# EAGLE board Ink_Time (EAGLE 9.7.0)
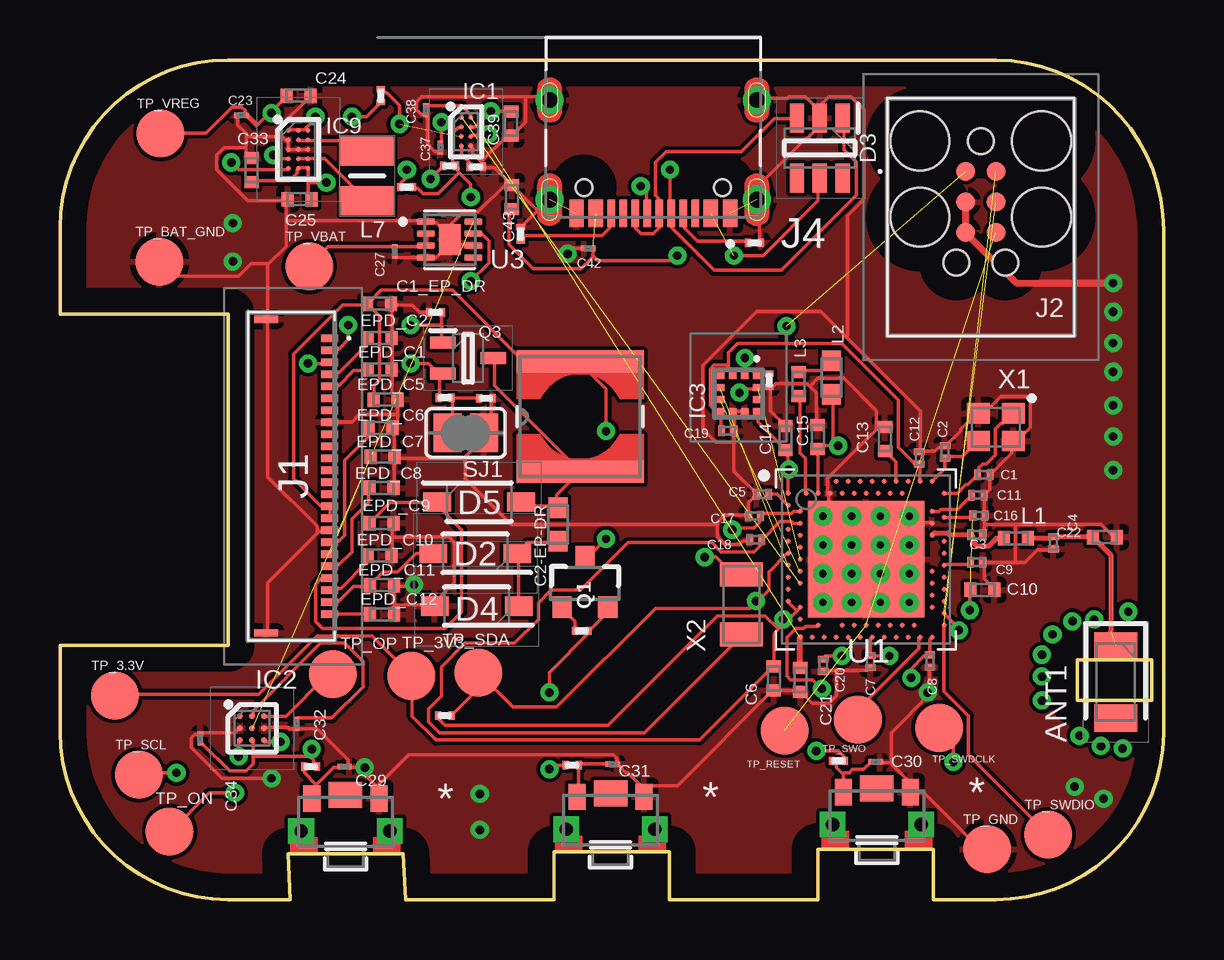
[diagram p0: board, top side]
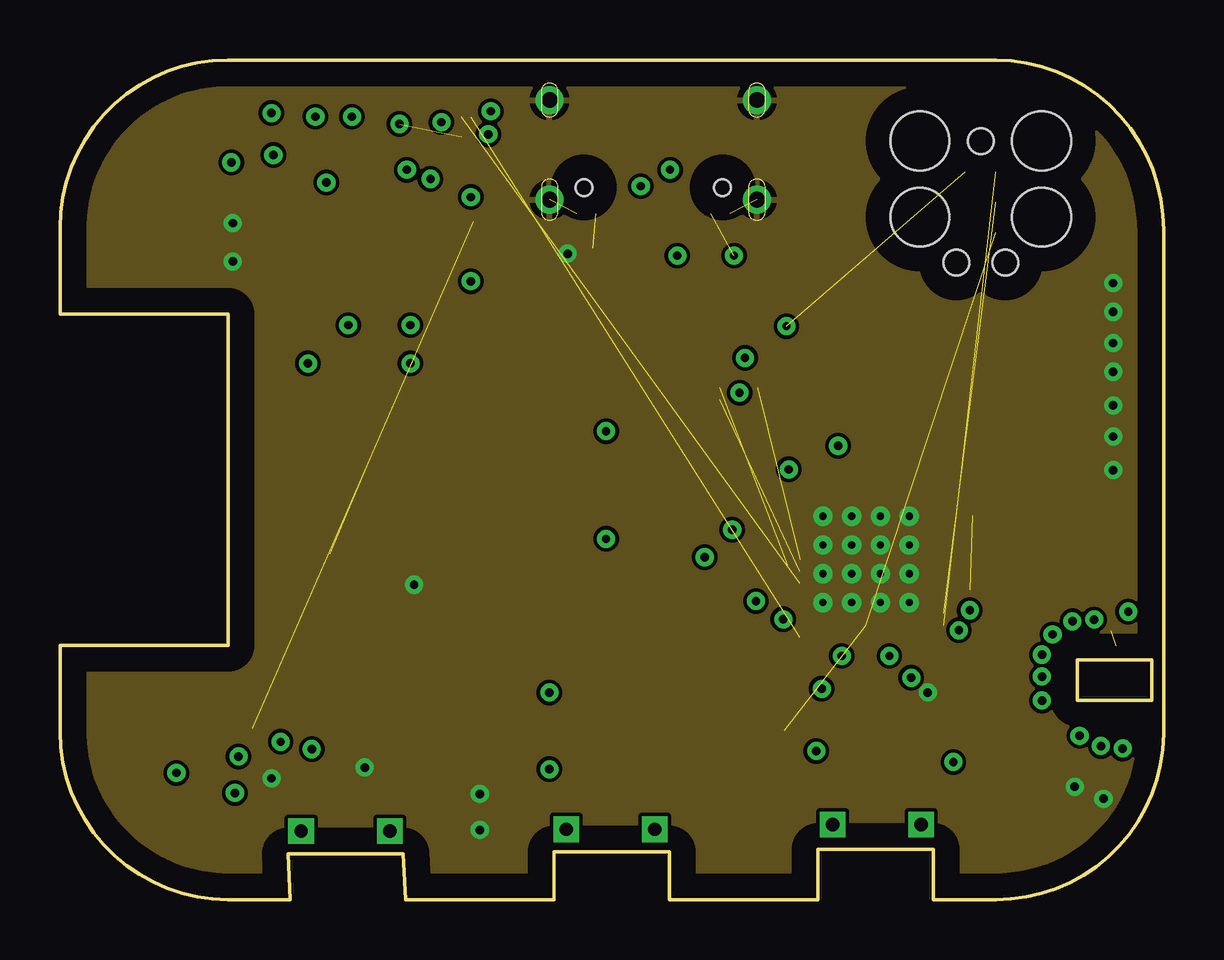
[diagram p1: board, inner layer Route2]
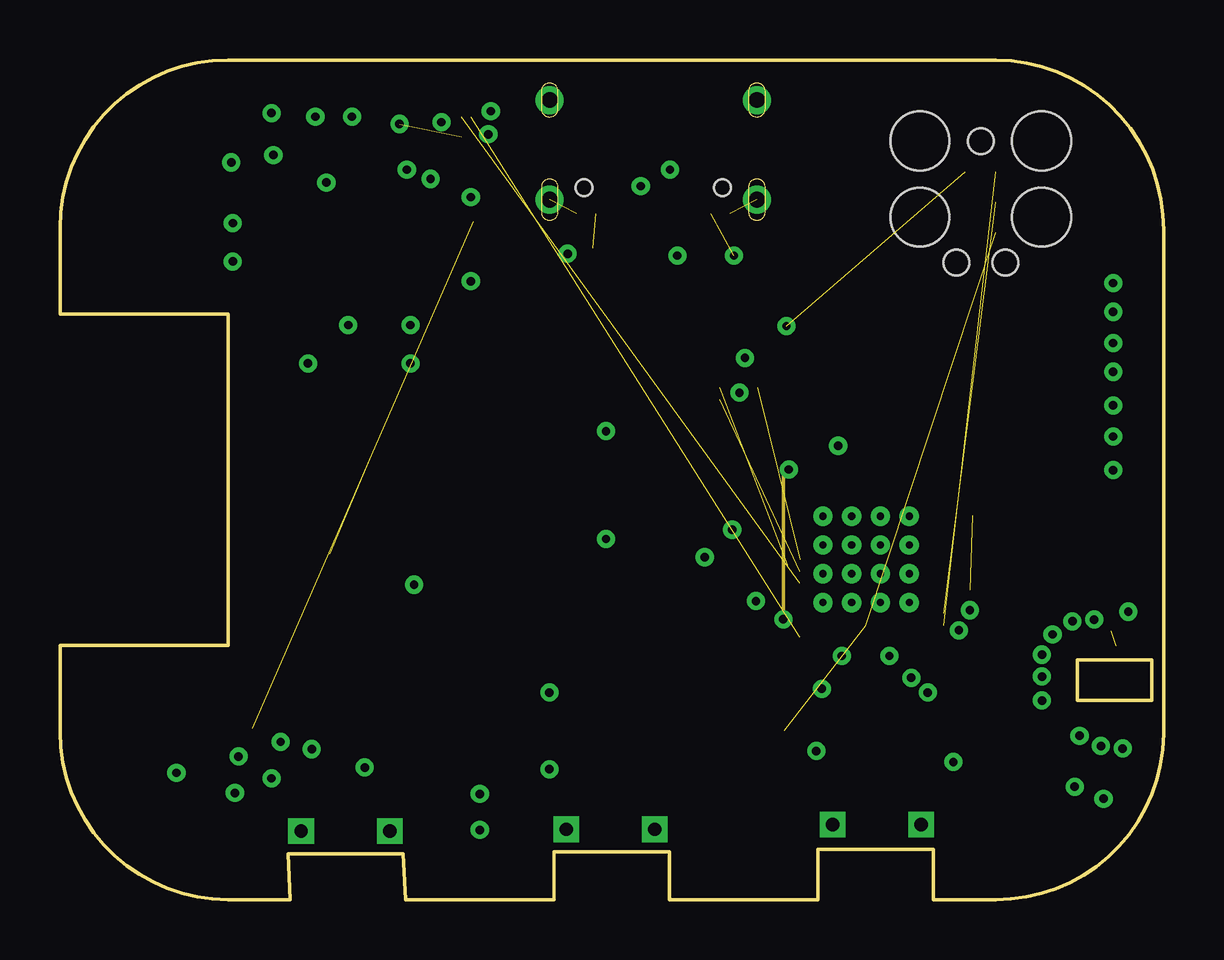
[diagram p2: board, inner layer Route15]
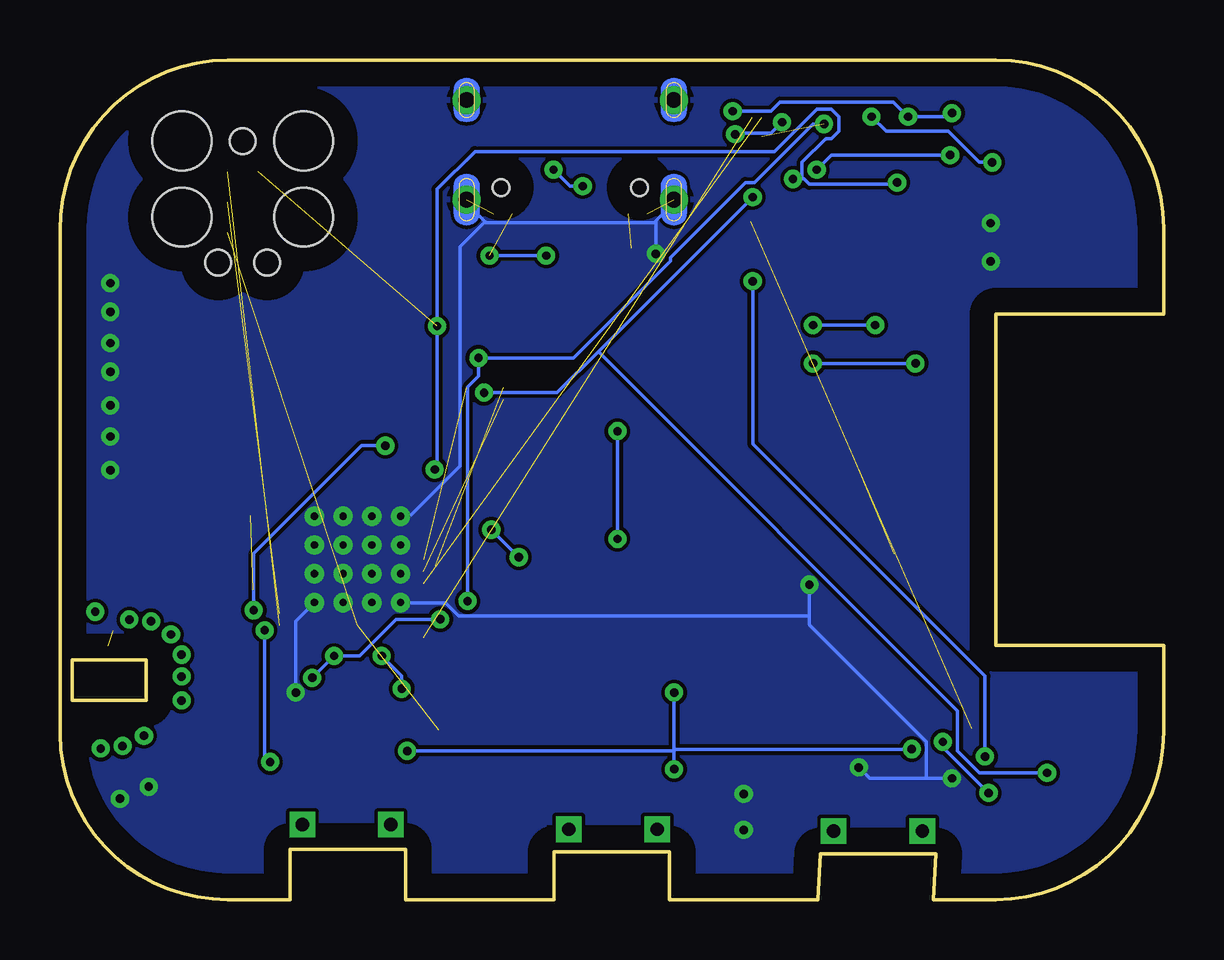
[diagram p3: board, bottom side, seen from below]

Size 46 x 35 mm. Coordinates in mm from the lower left corner, seen from the top.
Outline: 39,0 36.4,0 36.4,2.1 31.6,2.1 31.6,0 25.4,0 25.4,2 20.6,2 20.6,0 14.4,0 14.3,1.9 9.5,1.9 9.6,0 7,0 arc-90 0,7 0,10.6 7,10.6 7,24.4 0,24.4 0,28 arc-90 7,35 39,35 arc-90 46,27.9 46,6.9 arc-90 39,0
Outline: 45.5,10 42.4,10 42.4,8.3 45.5,8.3 45.5,10
Copper layers (1+2*15+16): Top 0.035mm / dielectric 1.5mm / Route2 0.035mm / dielectric 0.15mm / Route15 0.035mm / dielectric 0.2mm / Bottom 0.035mm
Design rules "Fusion Electronics Design Rules *": minimum track width 6mil, minimum drill 0.35mm, track to track 6mil, track to pad 6mil, pad to pad 6mil, via to via 6mil, smd to smd 6mil, copper to edge 40mil, drill to drill 6mil, minimum pad ring 10mil, minimum via ring 8mil, stop-mask expansion 4mil, vias tented up to drill 9999mil, thermal gap 10mil

## Footprints (pad centres in the part's own frame; a part is rotated, then mirrored left to right if it is on the bottom)
2450AT18B100E_ANTC3216X140N = smd 1.15 x 1.8: 1 -1.5,0; 2 1.5,0
NORDIC_NRF_3_RESC0201_L = smd 0.28 x 0.43: 1 -0.255,0; 2 0.255,0
NORDIC_NRF_3_RESC0402_L = smd 0.5 x 0.6: 1 -0.5,0; 2 0.5,0
NORDIC_NRF_3_RESC0603_L = smd 0.85 x 0.8: 1 -0.7,0; 2 0.7,0
GRM011R60J152KE01L_2_CAPC0201X13N = smd 0.22 x 0.23: 1 -0.185,0; 2 0.185,0
ESP32_C6_LIBRARY_5_SOD3716X135N = smd 1.15 x 0.8: 1 -1.75,0; 2 1.75,0
ESP32_C6_LIBRARY_3_SOT95P280X145-6N = smd 1.2 x 0.6: 1 -1.25,0.95; 2 -1.25,0; 3 -1.25,-0.95; 4 1.25,-0.95; 5 1.25,0; 6 1.25,0.95
RESC0402_L = smd 0.5 x 0.6: 1 -0.5,0; 2 0.5,0
BQ25180YBGR_BGA8C40P2X4_100X155X50 = smd 0.2 x 0.2: A1 -0.2,0.6; A2 0.2,0.6; B1 -0.2,0.2; B2 0.2,0.2; C1 -0.2,-0.2; C2 0.2,-0.2; D1 -0.2,-0.6; D2 0.2,-0.6
DRV2605YZFR_BGA9C50P3X3_144X144X62 = smd 0.25 x 0.25: A1 -0.5,0.5; A2 0,0.5; A3 0.5,0.5; B1 -0.5,0; B2 0,0; B3 0.5,0; C1 -0.5,-0.5; C2 0,-0.5; C3 0.5,-0.5
BMA423_BMA423 = smd 0.3 x 0.35: 1 -0.75,-0.775; 2 -0.25,-0.775; 3 0.25,-0.775; 4 0.75,-0.775; 7 0.75,0.775; 8 0.25,0.775; 9 -0.25,0.775; 10 -0.75,0.775 | smd 0.35 x 0.3: 5 0.775,-0.25; 6 0.775,0.25; 11 -0.775,0.25; 12 -0.775,-0.25
RT6160AWSC_BGA15C40P3X5_140X230X60 = smd 0.216 x 0.216: A1 -0.4,0.8; A2 0,0.8; A3 0.4,0.8; B1 -0.4,0.4; B2 0,0.4; B3 0.4,0.4; C1 -0.4,0; C2 0,0; C3 0.4,0; D1 -0.4,-0.4; D2 0,-0.4; D3 0.4,-0.4; E1 -0.4,-0.8; E2 0,-0.8; E3 0.4,-0.8
503480-2400_5034802400 = smd 0.3 x 0.7: 1 -5.75,1.525; 2 -5.25,1.525; 3 -4.75,1.525; 4 -4.25,1.525; 5 -3.75,1.525; 6 -3.25,1.525; 7 -2.75,1.525; 8 -2.25,1.525; 9 -1.75,1.525; 10 -1.25,1.525; 11 -0.75,1.525; 12 -0.25,1.525; 13 0.25,1.525; 14 0.75,1.525; 15 1.25,1.525; 16 1.75,1.525; 17 2.25,1.525; 18 2.75,1.525; 19 3.25,1.525; 20 3.75,1.525; 21 4.25,1.525; 22 4.75,1.525; 23 5.25,1.525; 24 5.75,1.525 | smd 0.3 x 1: MP1 -6.54,-1.125; MP2 6.54,-1.125
TC2030-IDC_TC2030IDC = smd 0.783 x 0.783: 1 -0.953,-0.635; 2 -0.953,0.635; 3 0.317,-0.635; 4 0.317,0.635; 5 1.588,-0.635; 6 1.588,0.635 | hole 2.451: -2.223,-2.54; -2.223,2.54; 0.952,-2.54; 0.952,2.54 | hole 1.067: -2.223,0; 2.857,-1.016; 2.857,1.016
KH-TYPE-C-16P_KINGHELM_KH-TYPE-C-16P = smd 0.6 x 1.15: A1_B12 -3.2,4.725; A4_B9 -2.4,4.725; A9_B4 2.4,4.725; A12_B1 3.2,4.725 | smd 0.3 x 1.15: A5 -1.25,4.725; A6 -0.25,4.725; A7 0.25,4.725; A8 1.25,4.725; B5 1.75,4.725; B6 0.75,4.725; B7 -0.75,4.725; B8 -1.75,4.725 | drill 0.65 pad 1.05: SH1 -4.32,0; SH2 4.32,0; SH3 -4.32,4.15; SH4 4.32,4.15 | hole 0.7: -2.89,3.65; 2.89,3.65
NORDIC_NRF_2_RESC0402_L = smd 0.5 x 0.6: 1 -0.5,0; 2 0.5,0
NORDIC_NRF_2_RESC0603_L = smd 0.85 x 0.8: 1 -0.7,0; 2 0.7,0
ESP32_C6_LIBRARY_2_IND_4828-WE-TPC_WRE = smd 0.9 x 5.3: 1 -2.286,0; 2 2.286,0
MLP2016SR47MT0S1_INDC2016X100N = smd 1.2 x 2.2: 1 -1.028,0; 2 1.028,0
ESP32_C6_LIBRARY_4_ESP32_C6_LIBRARY_4_ESP32_C6_LIBRARY_4_ESP32_C6_LIBRARY_4_ESP32_WROVER_SPARKFUN-DISCRETESEMI_SOT23-3 = smd 0.8 x 0.9: 1 -0.95,-1; 2 0.95,-1; 3 0,1.1
ESP32_C6_LIBRARY_6_SOT65P210X110-3N = smd 1.05 x 0.5: 1 -1.05,0.65; 2 -1.05,-0.65; 3 1.05,0
ERA-1AEB3401C_0201 = smd 0.35 x 0.25: 1 0,0.275; 2 0,-0.275
CPF0201D7K68C1_0201 = smd 0.35 x 0.25: 1 0,0.275; 2 0,-0.275
ESP32_C6_LIBRARY_7_JUMPER_SJ = smd 1.168 x 1.6: 1 -0.762,0; 2 0.762,0
2025-10-22_07-23-44_LIBRARY_SW_EVP-AKE31A_PAN = smd 0.711 x 1.092: 1 -1.4,-0.972; 2 1.4,-0.972 | drill 0.559 pad 0.914 square: 3 -1.848,0.381; 4 1.848,0.381 | smd 1.397 x 1.092: 5 0,-1.124
HECTOR_WATCH_1_TP20R = smd 2 x 2: TP 0,0
NORDIC_NRF_4_AQFN50P700X700X85_HS-74N = smd 4.85 x 4.85: P$74 0,0 | drill 0.3 pad 0.6: P$75 -1.8,1.8; P$76 -0.6,1.8; P$77 0.6,1.8; P$78 1.8,1.8; P$79 -1.8,0.6; P$80 -0.6,0.6; P$81 0.6,0.6; P$82 1.8,0.6; P$83 -1.8,-0.6; P$84 -0.6,-0.6; P$85 0.6,-0.6; P$86 1.8,-0.6; P$87 -1.8,-1.8; P$88 -0.6,-1.8; P$89 0.6,-1.8; P$90 1.8,-1.8 | smd 0.2 x 0.2: P$A8 -1.25,3.25; P$A10 -0.75,3.25; P$A12 -0.25,3.25; P$A14 0.25,3.25; P$A16 0.75,3.25; P$A18 1.25,3.25; P$A20 1.75,3.25; P$A22 2.25,3.25; P$A23 2.75,3.25; P$AA24 3.25,-2.25; P$AB2 -2.75,-2.5; P$AC5 -2,-2.75; P$AC9 -1,-2.75; P$AC11 -0.5,-2.75; P$AC13 0,-2.75; P$AC15 0.5,-2.75; P$AC17 1,-2.75; P$AC19 1.5,-2.75; P$AC21 2,-2.75; P$AC24 3.25,-2.75; P$AD2 -2.75,-3.25; P$AD4 -2.25,-3.25; P$AD6 -1.75,-3.25; P$AD8 -1.25,-3.25; P$AD10 -0.75,-3.25; P$AD12 -0.25,-3.25; P$AD14 0.25,-3.25; P$AD16 0.75,-3.25; P$AD18 1.25,-3.25; P$AD20 1.75,-3.25; P$AD22 2.25,-3.25; P$AD23 2.75,-3.25; P$B1 -3.25,2.75; P$B3 -2.5,2.75; P$B5 -2,2.75; P$B7 -1.5,2.75; P$B9 -1,2.75; P$B11 -0.5,2.75; P$B13 0,2.75; P$B15 0.5,2.75; P$B17 1,2.75; P$B19 1.5,2.75; P$B24 3.25,2.75; P$C1 -3.25,2.25; P$D2 -2.75,2; P$D23 2.75,2; P$E24 3.25,1.75; P$F2 -2.75,1.5; P$F23 2.75,1.5; P$G1 -3.25,1.25; P$H2 -2.75,1; P$H23 2.75,1; P$J1 -3.25,0.75; P$J24 3.25,0.75; P$K2 -2.75,0.5; P$L1 -3.25,0.25; P$L24 3.25,0.25; P$M2 -2.75,0; P$N1 -3.25,-0.25; P$N24 3.25,-0.25; P$P2 -2.75,-0.5; P$P23 2.75,-0.5; P$R1 -3.25,-0.75; P$R24 3.25,-0.75; P$T2 -2.75,-1; P$T23 2.75,-1; P$U1 -3.25,-1.25; P$U24 3.25,-1.25; P$V23 2.75,-1.5; P$W1 -3.25,-1.75; P$W24 3.25,-1.75; P$Y2 -2.75,-2; P$Y23 2.75,-2
ESP32_C6_LIBRARY_SON50P200X200X80-9N = smd 0.76 x 0.27: 1 -0.985,0.75; 2 -0.985,0.25; 3 -0.985,-0.25; 4 -0.985,-0.75; 5 0.985,-0.75; 6 0.985,-0.25; 7 0.985,0.25; 8 0.985,0.75 | smd 0.9 x 1.3: 9 0,0
NORDIC_NRF_BT-XTAL_2016_N = smd 0.95 x 0.85: 1 -0.725,-0.575; 2 0.725,-0.575; 3 0.725,0.575; 4 -0.725,0.575
NORDIC_NRF_1_XTAL_3215_N = smd 1 x 1.8: 1 -1.25,0; 2 1.25,0

## Placement (x,y rotation side)
ANT1  2450AT18B100E  [2450AT18B100E_ANTC3216X140N]  44.01,9.07 270 top
C1  12pF  [NORDIC_NRF_3_RESC0201_L]  38.51,17.71 0 top
C1_EP_DR  10uF  [NORDIC_NRF_3_RESC0402_L]  13.31,24.84 0 top
C2  12pF  [NORDIC_NRF_3_RESC0201_L]  36.89,18.66 90 top
C2-EP-DR  4.7uF/25V  [NORDIC_NRF_3_RESC0603_L]  20.76,15.64 90 top
C3  1pF  [NORDIC_NRF_3_RESC0201_L]  38.21,15.21 0 top
C4  1pF  [NORDIC_NRF_3_RESC0201_L]  41.41,14.87 270 top
C5  100nF  [NORDIC_NRF_3_RESC0201_L]  29.29,16.9 180 top
C6  4.7uF  [NORDIC_NRF_3_RESC0402_L]  29.75,9.21 270 top
C7  100nF  [NORDIC_NRF_3_RESC0201_L]  33.78,9.92 270 top
C8  100nF  [NORDIC_NRF_3_RESC0201_L]  36.26,9.94 270 top
C9  820pF  [NORDIC_NRF_3_RESC0201_L]  38.21,14.06 0 top
C10  N.C.  [NORDIC_NRF_3_RESC0402_L]  38.46,12.91 0 top
C11  100pF  [NORDIC_NRF_3_RESC0201_L]  38.26,16.86 0 top
C12  100nF  [NORDIC_NRF_3_RESC0201_L]  35.82,18.41 90 top
C13  N.C.  [NORDIC_NRF_3_RESC0402_L]  34.39,19.2 90 top
C14  4.7uF  [NORDIC_NRF_3_RESC0402_L]  30.24,19.24 90 top
C15  1.0uF  [NORDIC_NRF_3_RESC0402_L]  31.59,19.29 90 top
C16  47nF  [NORDIC_NRF_3_RESC0201_L]  38.31,16.01 0 top
C17  12pF  [NORDIC_NRF_3_RESC0201_L]  28.94,15.99 180 top
C18  12pF  [NORDIC_NRF_3_RESC0201_L]  29,15 180 top
C19  100nF  [NORDIC_NRF_3_RESC0201_L]  27.84,19.54 180 top
C20  4.7uf  [NORDIC_NRF_3_RESC0201_L]  31.81,9.77 270 top
C21  4.7uF  [NORDIC_NRF_3_RESC0402_L]  30.86,9.16 270 top
C22  N.C.  [NORDIC_NRF_3_RESC0402_L]  43.56,15.11 0 top
C23  0.1uF  [GRM011R60J152KE01L_2_CAPC0201X13N]  7.56,32.69 0 top
C24  10uF  [NORDIC_NRF_3_RESC0402_L]  9.94,33.51 180 top
C25  22uF  [NORDIC_NRF_3_RESC0402_L]  9.99,29.19 180 top
C27  0.1uF  [GRM011R60J152KE01L_2_CAPC0201X13N]  13.95,27.02 90 top
C29  1uF  [GRM011R60J152KE01L_2_CAPC0201X13N]  11.86,5.55 180 top
C30  1uF  [GRM011R60J152KE01L_2_CAPC0201X13N]  34,5.74 180 top
C31  1uF  [GRM011R60J152KE01L_2_CAPC0201X13N]  23.04,5.65 180 top
C32  1uF  [GRM011R60J152KE01L_2_CAPC0201X13N]  9.85,7.32 90 top
C33  22uF  [NORDIC_NRF_3_RESC0402_L]  7.99,30.41 90 top
C34  1uF  [GRM011R60J152KE01L_2_CAPC0201X13N]  5.85,6.72 270 top
C37  1uF  [GRM011R60J152KE01L_2_CAPC0201X13N]  15.85,31.34 90 top
C38  1uF  [GRM011R60J152KE01L_2_CAPC0201X13N]  15.25,32.9 90 top
C39  10uF  [NORDIC_NRF_3_RESC0402_L]  18.81,32.34 270 top
C42  0.1uF  [GRM011R60J152KE01L_2_CAPC0201X13N]  22.02,27.15 180 top
C43  4.7uF  [NORDIC_NRF_3_RESC0402_L]  18.84,29.29 90 top
D2  MBR0530  [ESP32_C6_LIBRARY_5_SOD3716X135N]  17.31,14.43 180 top
D3  USBLC6-2SC6Y  [ESP32_C6_LIBRARY_3_SOT95P280X145-6N]  31.67,31.33 270 top
D4  MBR0530  [ESP32_C6_LIBRARY_5_SOD3716X135N]  17.37,12.23 180 top
D5  MBR0530  [ESP32_C6_LIBRARY_5_SOD3716X135N]  17.47,16.57 0 top
EPD_C1  1uF/50V  [RESC0402_L]  13.32,22.09 0 top
EPD_C2  1uF/50V  [RESC0402_L]  13.32,23.41 0 top
EPD_C5  0.1uF/50V  [RESC0402_L]  13.58,20.84 0 top
EPD_C6  1uF/50V  [RESC0402_L]  13.37,19.66 0 top
EPD_C7  1uF/50V  [RESC0402_L]  13.45,18.46 0 top
EPD_C8  1uF/50V  [RESC0402_L]  13.4,17.16 0 top
EPD_C9  1uF/50V  [RESC0402_L]  13.41,15.69 0 top
EPD_C10  1uF/50V  [RESC0402_L]  13.32,14.34 0 top
EPD_C11  1uF/50V  [RESC0402_L]  13.42,13.11 0 top
EPD_C12  1uF/50V  [RESC0402_L]  13.42,11.89 0 top
IC1  BQ25180YBGR  [BQ25180YBGR_BGA8C40P2X4_100X155X50]  16.93,32.01 0 top
IC2  DRV2605YZFR  [DRV2605YZFR_BGA9C50P3X3_144X144X62]  8.01,7.14 0 top
IC3  BMA423  [BMA423_BMA423]  28.29,21.09 180 top
IC9  RT6160AWSC_RT6160AWSC  [RT6160AWSC_BGA15C40P3X5_140X230X60]  9.93,31.27 0 top
J1  503480-2400  [503480-2400_5034802400]  9.72,17.65 270 top
J2  TC2030-IDC  [TC2030-IDC_TC2030IDC]  38.38,29.4 270 top
J4  KH-TYPE-C-16P_KH-TYPE-C-16P  [KH-TYPE-C-16P_KINGHELM_KH-TYPE-C-16P]  24.73,33.33 180 top
L1  3.9nH  [NORDIC_NRF_2_RESC0402_L]  39.84,15.06 0 top
L2  10uH  [NORDIC_NRF_2_RESC0603_L]  32.16,21.76 270 top
L3  15nH  [NORDIC_NRF_2_RESC0402_L]  30.79,21.49 90 top
L5  68uH  [ESP32_C6_LIBRARY_2_IND_4828-WE-TPC_WRE]  21.68,20.13 90 top
L7  MLP2016SR47MT0S1_FTC252012SR47MBCA  [MLP2016SR47MT0S1_INDC2016X100N]  12.8,30.16 270 top
Q1  20V/4.2A/52mΩ/1.4W  [ESP32_C6_LIBRARY_4_ESP32_C6_LIBRARY_4_ESP32_C6_LIBRARY_4_ESP32_C6_LIBRARY_4_ESP32_WROVER_SPARKFUN-DISCRETESEMI_SOT23-3]  21.88,13.18 0 top
Q3  SI1308EDL-T1-GE3  [ESP32_C6_LIBRARY_6_SOT65P210X110-3N]  17.01,22.57 0 top
R1_EP_DR  0.47  [ERA-1AEB3401C_0201]  16.05,20.92 270 top
R1_USB  5k1  [ERA-1AEB3401C_0201]  28.95,27.38 270 top
R2  0  [ERA-1AEB3401C_0201]  13.38,33.51 0 top
R2_EP_DR  10k  [ERA-1AEB3401C_0201]  15.65,24.48 90 top
R2_USB  5k1  [ERA-1AEB3401C_0201]  19.2,27.75 180 top
R3  0  [ERA-1AEB3401C_0201]  29.57,21.65 0 top
R4  0  [ERA-1AEB3401C_0201]  14.45,29.7 270 top
R5  10k  [ERA-1AEB3401C_0201]  32.45,5.78 90 top
R7  10k  [ERA-1AEB3401C_0201]  10.45,5.54 90 top
R8  10k  [ERA-1AEB3401C_0201]  21.35,5.6 270 top
R9  10K  [CPF0201D7K68C1_0201]  17.35,30.54 270 top
R17  3k3  [ERA-1AEB3401C_0201]  16.24,30.58 90 top
R18  3k3  [CPF0201D7K68C1_0201]  16.04,7.67 90 top
R_PWR_EPD  10k  [ERA-1AEB3401C_0201]  21.75,11.2 90 top
R_TYPE_SEL  2.2  [ERA-1AEB3401C_0201]  17.75,20.89 270 top
SJ1  0  [ESP32_C6_LIBRARY_7_JUMPER_SJ]  16.91,19.45 180 top
SW_DN  2025-10-22_07-23-44_LIBRARY_EVP-AKE31ASW_EVP-AKE31A_PAN  [2025-10-22_07-23-44_LIBRARY_SW_EVP-AKE31A_PAN]  11.9,3.24 180 top
SW_ENT  2025-10-22_07-23-44_LIBRARY_EVP-AKE31ASW_EVP-AKE31A_PAN  [2025-10-22_07-23-44_LIBRARY_SW_EVP-AKE31A_PAN]  22.95,3.31 180 top
SW_UP  2025-10-22_07-23-44_LIBRARY_EVP-AKE31ASW_EVP-AKE31A_PAN  [2025-10-22_07-23-44_LIBRARY_SW_EVP-AKE31A_PAN]  34.05,3.51 180 top
TP_3.3V  HECTOR_WATCH_1_TPTP20R  [HECTOR_WATCH_1_TP20R]  2.29,8.51 0 top
TP_3V3  HECTOR_WATCH_1_TPTP20R  [HECTOR_WATCH_1_TP20R]  14.65,9.32 0 top
TP_BAT_GND  HECTOR_WATCH_1_TPTP20R  [HECTOR_WATCH_1_TP20R]  4.14,26.59 0 top
TP_GND  HECTOR_WATCH_1_TPTP20R  [HECTOR_WATCH_1_TP20R]  38.64,2.1 0 top
TP_ON  HECTOR_WATCH_1_TPTP20R  [HECTOR_WATCH_1_TP20R]  4.57,2.83 0 top
TP_OP  HECTOR_WATCH_1_TPTP20R  [HECTOR_WATCH_1_TP20R]  11.38,9.39 0 top
TP_RESET  HECTOR_WATCH_1_TPTP20R  [HECTOR_WATCH_1_TP20R]  30.2,7.04 0 top
TP_SCL  HECTOR_WATCH_1_TPTP20R  [HECTOR_WATCH_1_TP20R]  3.29,5.2 0 top
TP_SDA  HECTOR_WATCH_1_TPTP20R  [HECTOR_WATCH_1_TP20R]  17.43,9.46 0 top
TP_SWDCLK  HECTOR_WATCH_1_TPTP20R  [HECTOR_WATCH_1_TP20R]  36.64,7.16 0 top
TP_SWDIO  HECTOR_WATCH_1_TPTP20R  [HECTOR_WATCH_1_TP20R]  41.2,2.7 0 top
TP_SWO  HECTOR_WATCH_1_TPTP20R  [HECTOR_WATCH_1_TP20R]  33.26,7.49 0 top
TP_VBAT  HECTOR_WATCH_1_TPTP20R  [HECTOR_WATCH_1_TP20R]  10.39,26.39 0 top
TP_VREG  HECTOR_WATCH_1_TPTP20R  [HECTOR_WATCH_1_TP20R]  4.19,31.93 0 top
U1  NRF52840_QF  [NORDIC_NRF_4_AQFN50P700X700X85_HS-74N]  33.6,14.18 0 top
U3  MAX17048G+T10  [ESP32_C6_LIBRARY_SON50P200X200X80-9N]  16.24,27.51 0 top
X1  32MHz  [NORDIC_NRF_BT-XTAL_2016_N]  39.01,19.69 180 top
X2  32.768kHz  [NORDIC_NRF_1_XTAL_3215_N]  28.41,12.3 270 top

## Library data of the parts
ANT1 = InkTime_v5; ARROW_PART_NUMBER: 2450AT18B100E; ARROW_PRICE-STOCK: https://www.arrow.com/en/products/2450at18b100e/johanson-dielectrics?utm_currency=USD&region=nac; DESCRIPTION: Antennas 2.45GHz ANTENNA; HEIGHT: 1.4mm; MANUFACTURER_NAME: JOHANSON TECHNOLOGY; MANUFACTURER_PART_NUMBER: 2450AT18B100E; MOUSER_PART_NUMBER: 609-2450AT18B100E; MOUSER_PRICE-STOCK: https://www.mouser.co.uk/ProductDetail/Johanson-Technology/2450AT18B100E?qs=yCnrNFeXz%252Bh5MFsFIXGZGA%3D%3D
C1 C1_EP_DR C2 C2-EP-DR C3-C8 C10-C22 C24 C25 C33 C39 C43 L1-L3 R1_EP_DR R1_USB R2 R2_EP_DR R2_USB R3-R5 R7-R9 R17 R18 R_PWR_EPD R_TYPE_SEL SJ1 TP_3.3V TP_3V3 TP_BAT_GND TP_GND TP_ON TP_OP TP_RESET TP_SCL TP_SDA TP_SWDCLK TP_SWDIO TP_SWO TP_VBAT TP_VREG U1 X1 X2 = InkTime_v5
C9 = InkTime_v5; STATUS: N.C.
C23 C27 C29-C32 C34 C37 C38 C42 = InkTime_v5; AVAILABILITY: In Stock; CHECK_PRICES: https://www.snapeda.com/parts/GRM011R60J152KE01L/Murata/view-part/?ref=eda; DESCRIPTION: SMD Capacitor X5R(EIA) with Capacitance: 1500pF Tol. 10%. Rated Voltage: 6.3Vdc; MF: Murata; MP: GRM011R60J152KE01L; PACKAGE: 0201 Murata; PRICE: None; SNAPEDA_LINK: https://www.snapeda.com/parts/GRM011R60J152KE01L/Murata/view-part/?ref=snap
D2 D4 D5 = InkTime_v5; AVAILABILITY: In Stock; CHECK_PRICES: https://www.snapeda.com/parts/MBR0530/Onsemi/view-part/?ref=eda; DESCRIPTION: Diode Schottky 30 V 500mA Surface Mount SOD-123; MF: ON Semiconductor; MP: MBR0530; PACKAGE: SOD-123-2 ON Semiconductor; PRICE: None; PURCHASE-URL: https://www.snapeda.com/api/url_track_click_mouser/?unipart_id=179458&manufacturer=ON Semiconductor&part_name=MBR0530&search_term=None; SNAPEDA_LINK: https://www.snapeda.com/parts/MBR0530/Onsemi/view-part/?ref=snap
D3 = InkTime_v5; AVAILABILITY: In Stock; CHECK_PRICES: https://www.snapeda.com/parts/USBLC6-2SC6Y/STMicroelectronics/view-part/?ref=eda; DESCRIPTION: 17V Clamp 5A (8/20µs) Ipp Tvs Diode Surface Mount SOT-23-6; MF: STMicroelectronics; MP: USBLC6-2SC6Y; PACKAGE: SOT-23-6 STMicroelectronics; PRICE: None; SNAPEDA_LINK: https://www.snapeda.com/parts/USBLC6-2SC6Y/STMicroelectronics/view-part/?ref=snap
EPD_C1 EPD_C2 EPD_C5-EPD_C12 = Nordic_nRF
IC1 = InkTime_v5; ARROW_PART_NUMBER: BQ25180YBGR; ARROW_PRICE-STOCK: https://www.arrow.com/en/products/bq25180ybgr/texas-instruments?utm_currency=USD&region=nac; DESCRIPTION: Charger IC Lithium Ion/Polymer, Lithium Iron Phosphate 8-DSBGA (1.6x1.1); HEIGHT: 0.5mm; MANUFACTURER_NAME: Texas Instruments; MANUFACTURER_PART_NUMBER: BQ25180YBGR; MOUSER_PART_NUMBER: 595-BQ25180YBGR; MOUSER_PRICE-STOCK: https://www.mouser.co.uk/ProductDetail/Texas-Instruments/BQ25180YBGR?qs=doiCPypUmgEWjAK%252BJAX6Tw%3D%3D
IC2 = InkTime_v5; ARROW_PART_NUMBER: DRV2605YZFR; ARROW_PRICE-STOCK: https://www.arrow.com/en/products/drv2605yzfr/texas-instruments?region=nac; DESCRIPTION: Haptic Driver for ERM/LRA with Built-In Library and Smart Loop Architecture; HEIGHT: 0.625mm; MANUFACTURER_NAME: Texas Instruments; MANUFACTURER_PART_NUMBER: DRV2605YZFR
IC3 = InkTime_v5; ARROW_PART_NUMBER: BMA423; ARROW_PRICE-STOCK: https://www.arrow.com/en/products/bma423/bosch; DESCRIPTION: Accelerometers Triaxial low-g 12bit Acceleration Sensor; HEIGHT: 1mm; MANUFACTURER_NAME: BOSCH; MANUFACTURER_PART_NUMBER: BMA423; MOUSER_PART_NUMBER: 262-BMA423; MOUSER_PRICE-STOCK: https://www.mouser.co.uk/ProductDetail/Bosch-Sensortec/BMA423?qs=HXFqYaX1Q2xC%252BSgeGoX3mg%3D%3D
IC9 = InkTime_v5; DESCRIPTION: Buck-Boost Regulator Positive Output Step-Up/Step-Down I2C DC-DC Controller IC 15-WL-CSP (BSC) (1.4x2.3); HEIGHT: 0.6mm; MANUFACTURER_NAME: RICHTEK; MANUFACTURER_PART_NUMBER: RT6160AWSC; MOUSER_PART_NUMBER: 835-RT6160AWSC; MOUSER_PRICE-STOCK: https://www.mouser.co.uk/ProductDetail/Richtek/RT6160AWSC?qs=amGC7iS6iy%2FLd9PSoixZXQ%3D%3D
J1 = InkTime_v5; DESCRIPTION: FFC & FPC Connectors 0.5mm FPC RA SMT Dual Contact 24Ckt; HEIGHT: 1.87mm; MANUFACTURER_NAME: Molex; MANUFACTURER_PART_NUMBER: 503480-2400; MOUSER_PART_NUMBER: 538-503480-2400; MOUSER_PRICE-STOCK: https://www.mouser.co.uk/ProductDetail/Molex/503480-2400?qs=OAhjpuo3Vu7efIoxFh9AOw%3D%3D
J2 = InkTime_v5; DESCRIPTION: CABLE ADAPTER 6 POS; HEIGHT: 19mm; MANUFACTURER_NAME: Tag Connect; MANUFACTURER_PART_NUMBER: TC2030-IDC
J4 = InkTime_v5; AVAILABILITY: Not in stock; CHECK_PRICES: https://www.snapeda.com/parts/KH-TYPE-C-16P/Kinghelm/view-part/?ref=eda; MF: kinghelm; MP: KH-TYPE-C-16P; PACKAGE: None; PRICE: None; SNAPEDA_LINK: https://www.snapeda.com/parts/KH-TYPE-C-16P/Kinghelm/view-part/?ref=snap
L5 = InkTime_v5; COPYRIGHT: Copyright (C) 2024 Ultra Librarian. All rights reserved.; MANUFACTURER_PART_NUMBER: 744043680; MFR_NAME: Wurth Electronics
L7 = InkTime_v5; DESCRIPTION: SMD / SMT Inductors (Coils), L=0.47?H, L x W x T :; HEIGHT: 1mm; JLCPCB: https://jlcpcb.com/partdetail/6763488-FTC252012SR47MBCA/C5832368; MANUFACTURER_NAME: TDK; MANUFACTURER_PART_NUMBER: FTC252012SR47MBCA
Q1 = InkTime_v5; PROD_ID: TRAN-14388
Q3 = InkTime_v5; AVAILABILITY: In Stock; CHECK_PRICES: https://www.snapeda.com/parts/SI1308EDL-T1-GE3/Vishay+Siliconix/view-part/?ref=eda; DESCRIPTION: Si1308EDL-T1-GE3 N-channel MOSFET Transistor, 1.5 A, 30 V, 3-Pin SC-70 | Siliconix / Vishay SI1308EDL-T1-GE3; MF: Vishay Siliconix; MP: SI1308EDL-T1-GE3; PACKAGE: SOT-323 Vishay Semiconductor; PRICE: None; PURCHASE-URL: https://www.snapeda.com/api/url_track_click_mouser/?unipart_id=274603&manufacturer=Vishay Siliconix&part_name=SI1308EDL-T1-GE3&search_term=None; SNAPEDA_LINK: https://www.snapeda.com/parts/SI1308EDL-T1-GE3/Vishay+Siliconix/view-part/?ref=snap
SW_DN SW_ENT SW_UP = InkTime_v5; COPYRIGHT: Copyright (C) 2025 Ultra Librarian. All rights reserved.; DIGI-KEY_PART_NUMBER_1: P123437TR-ND; DIGI-KEY_PART_NUMBER_2: P123437CT-ND; DIGI-KEY_PART_NUMBER_3: P123437DKR-ND; MANUFACTURER_NAME: Panasonic; MANUFACTURER_PART_NUMBER: EVP-AKE31A
U3 = InkTime_v5; AVAILABILITY: In Stock; CHECK_PRICES: https://www.snapeda.com/parts/MAX17048G+T10/Analog+Devices/view-part/?ref=eda; DESCRIPTION: 3µA 1-Cell/2-Cell Fuel Gauge with ModelGauge; MF: Analog Devices; MP: MAX17048G+T10; PACKAGE: TDFN-8 Maxim; PRICE: None; PURCHASE-URL: https://www.snapeda.com/api/url_track_click_mouser/?unipart_id=329239&manufacturer=Analog Devices&part_name=MAX17048G+T10&search_term=None; SNAPEDA_LINK: https://www.snapeda.com/parts/MAX17048G+T10/Analog+Devices/view-part/?ref=snap

## Nets
3V3/1.7D [Power]: C34.2 IC2.C2 Q1.2 R5.2 R7.2 R8.2 R_PWR_EPD.2
3V3/2.4A [Power]: C6.1 C7.1 C8.1 C12.1 C14.1 C19.2 C25.1 C33.1 IC3.3 IC3.7 IC3.10 IC9.E2 IC9.E3 J2.1 R17.1 R18.1 TP_3.3V.TP TP_3V3.TP U1.P$A22 U1.P$AD14 U1.P$AD23 U1.P$B1 U1.P$W1 U1.P$Y2
ALERT/1.6C: U3.5
ALERT/2.5C: U1.P$J24
D+/1.5D: D3.4
D+/2.7D: U1.P$AD6
D-/1.5D: D3.6
D-/2.7D: U1.P$AD4
DN: D3.1 J4.A7 J4.B7
DP: D3.3 J4.A6 J4.B6
EPD_3V3: C1_EP_DR.1 EPD_C5.1 J1.15 J1.16 L5.2 Q1.3
EPD_BUSY/1.5D: J1.9
EPD_BUSY/2.2D: U1.P$AD12
EPD_CS/1.4C: J1.12
EPD_CS/2.2D: U1.P$K2
EPD_DC/1.5D: J1.11
EPD_DC/2.2D: U1.P$AD10
EPD_RST/1.5D: J1.10
EPD_RST/2.2D: U1.P$AC11
GDR: J1.2 Q3.1 R2_EP_DR.2
GND [Power]: C1.2 C1_EP_DR.2 C2.2 C3.2 C4.2 C5.2 C6.2 C7.2 C8.2 C9.2 C10.2 C11.2 C12.2 C13.2 C14.2 C15.2 C16.2 C17.2 C18.2 C19.1 C20.2 C21.2 C22.2 C23.1 C24.1 C25.2 C27.1 C29.1 C30.1 C31.1 C32.1 C33.2 C34.1 C37.1 C38.1 C39.2 C42.2 C43.2 D3.2 D4.2 EPD_C1.2 EPD_C2.2 EPD_C5.2 EPD_C6.2 EPD_C7.2 EPD_C8.2 EPD_C9.2 EPD_C10.2 EPD_C11.2 EPD_C12.2 IC1.D2 IC2.B1 IC2.B3 IC3.8 IC3.9 IC9.B1 IC9.C1 IC9.C2 IC9.C3 J1.8 J1.17 J1.MP1 J1.MP2 J2.3 J2.5 J4.A1_B12 J4.A12_B1 J4.SH1 J4.SH2 J4.SH3 J4.SH4 R1_USB.1 R2_EP_DR.1 R2_USB.2 R3.2 R9.1 R_TYPE_SEL.1 SJ1.1 SW_DN.1 SW_ENT.1 SW_UP.1 TP_BAT_GND.TP TP_GND.TP U1.P$74 U1.P$75 U1.P$76 U1.P$77 U1.P$78 U1.P$79 U1.P$80 U1.P$81 U1.P$82 U1.P$83 U1.P$84 U1.P$85 U1.P$86 U1.P$87 U1.P$88 U1.P$89 U1.P$90 U1.P$B7 U1.P$F23 U3.1 U3.4 U3.6 U3.9 X1.2 X1.4
HAPTIC_EN/1.4C: IC2.A1
HAPTIC_EN/2.6A: U1.P$U1
IMU_INT1: IC3.5 U1.P$N1
IMU_INT2: IC3.6 U1.P$P2
LX1: IC9.B2 IC9.B3 L7.1
LX2: IC9.D2 IC9.D3 L7.2
MOSI/1.5B [signals]: J1.14
MOSI/2.2D [signals]: U1.P$B13
N$1: C20.1 U1.P$AC5
N$4: C18.1 U1.P$F2 X2.2
N$5: C5.1 U1.P$C1
N$7: C11.1 U1.P$D23
N$8: C2.1 U1.P$A23 X1.3
N$9: L2.1 L3.2
N$10: L3.1 U1.P$B3
N$12: IC3.1 R3.1
N$16: IC9.E1 R2.2
N$17: IC9.D1 R4.2
N$18: C17.1 U1.P$D2 X2.1
N$19: IC1.D1 R9.2
N$21: C32.2 IC2.A2
N$22: J4.A5 R1_USB.2
N$23: J4.B5 R2_USB.1
N$24: EPD_C2.1 J1.4
N$25: EPD_C1.1 J1.5
N$26: EPD_C6.1 J1.18
N$27: C13.1 U1.P$A18
N$28: EPD_C7.1 J1.19
N$29: EPD_C8.1 J1.20
N$30: EPD_C10.1 J1.22
N$31: EPD_C12.1 J1.24
N$32: C10.1 C15.1 C16.1 L2.2 U1.P$B5 U1.P$E24
N$33: C1.1 U1.P$B24 X1.1
N$34: R1_EP_DR.1 R_TYPE_SEL.2 SJ1.2
N$35: C2-EP-DR.2 D5.2 L5.1 Q3.3
N$37: C2-EP-DR.1 D2.1 D4.1
N$39: C3.1 L1.1 U1.P$H23
N$40: ANT1.1 C4.1 C22.1 L1.2
N$41: C9.1 U1.P$N24
OUT+: IC2.A3 TP_OP.TP
OUT-: IC2.C3 TP_ON.TP
P0.04: U1.P$J1
P0.09: U1.P$L24
P0.13/1.5D: C30.2 R5.1 SW_UP.2
P0.13/2.6C: U1.P$AD8
P0.14/1.5D: C31.2 R8.1 SW_ENT.2
P0.14/2.7C: U1.P$AC9
P0.19: U1.P$AC15
P0.20: U1.P$AD16
P0.21: U1.P$AC17
P0.22: U1.P$AD18
P0.23: U1.P$AC19
P0.24: U1.P$AD20
P0.25: U1.P$AC21
P0.26: U1.P$G1
P0.27: U1.P$H2
P0.28: U1.P$B11
P0.29: U1.P$A10
P0.30: U1.P$B9
P0.31: U1.P$A8
P1.01: U1.P$Y23
P1.01/1.6C: Q1.1 R_PWR_EPD.1
P1.02/1.6C: C29.2 R7.1 SW_DN.2
P1.02/2.8C: U1.P$W24
P1.03: U1.P$V23
P1.04: U1.P$U24
P1.05: U1.P$T23
P1.06: U1.P$R24
P1.07: U1.P$P23
P1.09: U1.P$R1
P1.10: U1.P$A20
P1.11: U1.P$B19
P1.12: U1.P$B17
P1.13: U1.P$A16
P1.14: U1.P$B15
P1.15: U1.P$A14
PMIC_INT: IC1.A1 U1.P$T2
PREVGH: D5.1 EPD_C9.1 J1.21
PREVGL: D2.2 EPD_C11.1 J1.23
RESE: J1.3 Q3.2 R1_EP_DR.2
RESET: J2.6 TP_RESET.TP U1.P$AC13
SCK/1.5B [signals]: J1.13
SCK/2.2D [signals]: U1.P$A12
SCL/1.4C [signals]: IC2.C1 U3.7
SCL/2.4C [signals]: IC1.B1 IC3.12 R4.1 R17.2 TP_SCL.TP U1.P$M2
SDA/1.4C [signals]: IC2.B2 U3.8
SDA/2.4C [signals]: IC1.C1 IC3.2 R2.1 R18.2 TP_SDA.TP U1.P$L1
SWDCLK [signals]: J2.4 TP_SWDCLK.TP U1.P$AA24
SWDIO [signals]: J2.2 TP_SWDIO.TP U1.P$AC24
SWO [signals]: TP_SWO.TP U1.P$AD22
VBAT/1.2A [Power]: C27.2 TP_VBAT.TP U3.2 U3.3
VBAT/2.5C [Power]: C37.2 IC1.C2
VBUS/1.5D [Power]: C42.1 C43.1 D3.5 J4.A4_B9 J4.A9_B4
VBUS/2.6D [Power]: C21.1 C38.2 IC1.A2 U1.P$AD2
VREG [Power]: C23.2 C24.2 C39.1 IC1.B2 IC9.A1 IC9.A2 IC9.A3 TP_VREG.TP

## Tracks (layer width: path | path; a pad name or v marks a point on that pad's centre or on a via)
3V3/1.7D  (via drill 0.35)
  Top 0.152: 8.06,5.96 8.06,6.57 IC2.C2 | 8.06,5.96 8.06,5.66 7.75,5.36 7.07,5.36 5.92,6.5 C34.2 | 10.46,5.93 10.42,5.96 8.06,5.96 | 10.46,5.93 10.57,5.81 10.57,5.74 10.72,5.58 R7.2 | v20.4,5.43 20.55,5.58 21.01,5.58 R8.2 | v20.4,8.63 20.4,9.47 22.08,11.15 R_PWR_EPD.2 22.08,11.22 22.76,11.91 22.76,12.14 Q1.2 | v31.53,6.19 32.44,6.19 32.67,5.96 32.67,5.81 R5.2 | v10.49,6.27 10.49,5.96 10.46,5.93
  Bottom 0.152: v20.4,8.63 20.4,6.27 | 20.4,6.27 20.4,6.19 | 20.4,6.19 v20.4,5.43 | 20.4,6.19 v31.53,6.19 | 20.4,6.27 v10.49,6.27
3V3/2.4A  (via drill 0.35)  (1 unrouted)
  Top 0.152: 30.35,17.93 30.35,18.63 C14.1 30.23,18.77 29.09,19.91 29.09,20.29 IC3.10 | 30.35,17.93 U1.P$B1 | U1.P$A22 35.85,18.12 C12.1 35.79,18.16 35.64,18.16 34.95,18.84 34.95,20.82 32.59,23.19 30.28,23.19 | U1.P$AD14 33.78,10.86 C7.1 33.81,10.16 v34.57,10.16 | U1.P$AD23 36.26,10.84 C8.1 36.25,10.16 36.02,10.16 35.49,9.62 v35.49,9.24 | 29.95,11.28 29.75,11.08 C6.1 29.7,9.7 26.65,6.65 15.68,6.65 14.69,7.64 14.69,9.32 TP_3V3.TP 14.61,9.39 13.01,10.99 10.72,10.99 8.28,8.56 2.34,8.56 TP_3.3V.TP | 29.95,11.28 30.25,11.58 | 30.25,11.58 30.71,12.04 | 30.71,12.04 U1.P$Y2 | 30.71,12.04 30.38,12.37 U1.P$W1 | 29.95,11.28 29.39,11.83 27.41,11.83 22.84,7.26 16.06,7.26 15.83,7.49 15.83,7.64 R18.1 | 30.25,11.58 v30.15,11.68 | 10.34,29.89 10.34,29.28 10.42,29.21 C25.1 | 10.34,29.89 10.34,30.42 IC9.E3 10.27,30.5 9.96,30.5 IC9.E2 9.88,30.42 9.88,30.27 9.58,29.97 8.06,29.97 C33.1 | v15.45,30.04 15.9,30.5 R17.1 | 10.34,29.89 v11.1,29.89 | C19.2 27.56,19.61 27.56,20.29 IC3.7 27.49,20.37 27.33,20.37 27.11,20.6 27.11,22.12 27.26,22.27 27.79,22.27 27.83,22.23 | 27.83,22.23 28.02,22.04 28.02,21.89 IC3.3 | 30.28,23.19 28.25,23.19 27.87,22.8 27.87,22.27 27.83,22.23 | 30.28,23.19 v30.28,23.91 | v30.38,17.93 30.35,17.93
  Route15 0.152: v30.15,11.68 30.15,17.7 v30.38,17.93
  Bottom 0.152: v35.49,9.24 v34.57,10.16 33.51,10.16 31.98,11.68 v30.15,11.68 | 15.07,30.04 14.99,30.04 14.76,29.82 11.18,29.82 v11.1,29.89 | 15.07,30.04 v15.45,30.04 | v30.38,17.93 30.28,18.03 v30.28,23.91 30.28,29.61 28.71,31.19 16.21,31.19 14.46,32.94 13.85,32.94 13.54,32.63 13.54,32.03 13.85,31.72 14.08,31.72 15.07,30.73 15.07,30.04
DN  (via drill 0.35)
  Top 0.152: v24.21,29.74 24.44,29.51 24.44,28.67 J4.A7 | v25.43,30.42 25.43,28.67 J4.B7 25.51,28.6 25.51,27.99 27.26,26.23 30.08,26.23 33.2,29.36 33.2,30.73 32.67,31.26 32.67,32.56 D3.1
  Bottom 0.152: v24.21,29.74 24.74,29.74 v25.43,30.42
DP
  Top 0.152: J4.B6 23.98,27.99 24.21,27.76 24.74,27.76 24.97,27.99 J4.A6 24.97,28.67 24.97,29.21 24.82,29.36 24.82,30.73 25.28,31.19 28.4,31.19 29.77,32.56 30.69,32.56 D3.3
EPD_3V3  (via drill 0.35)
  Top 0.152: v22.76,15.03 22.08,14.35 21.92,14.35 Q1.3 | v22.76,19.53 22.76,21.28 21.7,22.35 L5.2 21.62,22.42 19.33,22.42 16.36,25.4 13.39,25.4 12.86,24.86 C1_EP_DR.1 | J1.16 11.26,15.95 11.26,16.33 J1.15 11.18,16.41 10.88,16.41 9.73,17.55 9.73,22.73 11.79,24.79 12.78,24.79 C1_EP_DR.1 | EPD_C5.1 13.08,20.9 13.08,21.43 13.31,21.66 13.31,24.33 12.86,24.79 C1_EP_DR.1
  Bottom 0.152: v22.76,19.53 v22.76,15.03
GDR  (via drill 0.35)
  Top 0.152: 15.9,23.95 15.9,23.26 Q3.1 | 15.9,23.95 15.9,24.41 R2_EP_DR.2 | v12.02,23.95 12.02,23.34 11.64,22.96 11.26,22.96 J1.2 | 15.9,23.95 v14.61,23.95
  Bottom 0.152: v14.61,23.95 v12.02,23.95
GND  (via drill 0.35)  (2 unrouted)
  Top 0.152: 38.54,14.04 38.54,13.36 38.92,12.98 C10.2 | 38.54,14.04 C9.2 | 38.54,14.04 39.83,14.04 | 39.83,14.04 40.21,14.04 40.75,14.58 41.36,14.58 C4.2 | 38.54,15.64 38.54,15.95 C16.2 38.54,16.02 38.54,16.79 C11.2 38.54,16.86 38.76,17.09 C1.2 38.84,17.78 39.68,18.61 39.68,19.07 X1.4 39.75,19.15 39.91,19.15 40.44,19.68 40.44,20.82 40.29,20.98 39.22,20.98 38.54,20.29 38.31,20.29 X1.2 38.23,20.29 37.55,19.61 37.55,19.53 36.94,18.92 C2.2 36.86,18.84 36.63,18.84 36.48,18.69 35.87,18.69 C12.2 35.87,18.77 35.87,20.37 32.78,23.45 | 38.54,15.64 38.54,15.26 C3.2 | 38.54,15.64 39.83,15.64 | 39.83,15.64 43.41,15.64 43.87,15.18 44.02,15.18 C22.2 | 39.83,15.64 39.83,14.04 | IC3.9 28.48,20.37 28.1,20.37 IC3.8 28.1,20.29 28.1,19.61 C19.1 28.1,19.53 28.1,19.07 | 27.41,15.64 27.41,15.72 27.72,16.02 28.63,16.02 C17.2 28.71,16.02 28.71,16.56 29.01,16.86 C5.2 29.01,16.94 28.1,17.85 28.1,19.07 | 27.41,15.64 27.41,15.11 27.72,14.8 28.32,14.8 28.48,14.96 28.71,14.96 C18.2 | R2_EP_DR.1 14.99,24.48 14.69,24.79 13.85,24.79 C1_EP_DR.2 13.85,24.71 13.85,23.41 EPD_C2.2 13.85,23.34 13.85,22.12 EPD_C1.2 13.85,22.04 13.85,21.13 14.08,20.9 EPD_C5.2 14.08,20.82 14.08,20.21 | R_TYPE_SEL.1 17.96,20.82 17.96,19.68 17.73,19.45 SJ1.1 17.66,19.38 17.66,19.22 16.86,18.42 | EPD_C8.2 13.92,17.17 13.92,18.39 EPD_C7.2 | EPD_C7.2 13.92,18.46 13.92,19.61 EPD_C6.2 13.92,19.68 14.08,19.83 14.08,20.21 | 14.08,20.21 12.48,20.21 12.17,19.91 11.26,19.91 J1.8 | 16.86,18.42 16.82,18.39 14,18.39 EPD_C7.2 | 27.41,15.64 18.8,15.64 16.89,17.55 16.89,18.39 16.86,18.42 | 28.1,19.07 27.33,19.07 26.8,19.61 26.8,22.27 29.04,24.51 31.72,24.51 32.78,23.45
  Top 0.152: 32.36,9.55 33.66,9.55 33.73,9.62 C7.2 | 32.36,9.55 31.83,9.55 C20.2 | 32.36,9.55 32.36,8.48 32.06,8.17 31.37,8.17 30.92,8.63 C21.2 30.84,8.71 29.77,8.71 C6.2 29.7,8.71 25.73,4.75 24.29,4.75 SW_ENT.1 24.29,4.29 24.29,4.67 23.68,5.28 23.6,5.28 23.3,5.58 C31.1 23.22,5.89 23.07,6.04 14.53,6.04 13.24,4.75 SW_DN.1 13.24,4.21 13.24,4.67 12.55,5.36 | 13.85,15.11 13.85,15.64 EPD_C9.2 | 13.85,15.11 13.85,14.35 EPD_C10.2 | 13.92,12.29 13.92,13.05 EPD_C11.2 14,13.05 14.69,13.05 v14.76,13.13 | 13.92,12.29 13.92,11.91 EPD_C12.2 | 13.92,12.29 15.6,12.29 D4.2 15.6,12.37 16.44,13.2 16.44,14.88 16.21,15.11 13.85,15.11 | IC2.B1 7.45,7.11 7.29,6.96 5.92,6.96 C34.1 5.85,6.88 5.62,6.88 5.46,6.73 5.46,6.35 6.76,5.05 v8.82,5.05 | IC2.B3 8.51,7.18 9.5,7.18 9.58,7.11 9.81,7.11 C32.1 9.88,7.11 10.72,7.11 12.02,5.81 12.02,5.58 C29.1 12.09,5.51 12.4,5.51 12.55,5.36 | 12.55,5.36 v12.7,5.51 | 34.61,5.7 35.41,4.9 35.41,4.52 SW_UP.1 35.49,4.44 36.02,4.44 38.31,2.15 38.61,2.15 TP_GND.TP | 36.25,8.63 36.25,8.56 34.65,6.96 34.65,5.74 34.61,5.7 | 36.25,8.63 36.25,9.62 C8.2 | C14.2 30.23,19.76 29.62,20.37 29.62,21.36 R3.2 29.7,21.36 29.85,21.51 31.14,21.51 31.26,21.4 | 31.26,21.4 31.53,21.13 31.53,19.83 C15.2 | 32.06,16.86 32.06,16.25 31.83,16.02 | 32.06,16.86 U1.P$B7 | U1.P$F23 36.33,15.72 35.64,15.72 35.41,15.95 U1.P$74 | 34.08,19.64 31.98,17.55 31.98,16.86 32.06,16.86 | 34.08,19.64 34.12,19.68 34.34,19.68 C13.2 | U1.P$87 31.83,12.44 31.83,13.51 U1.P$74 | U1.P$83 31.83,13.58 U1.P$74 | 32.44,15.41 31.83,14.8 U1.P$79 | U1.P$88 33.05,12.44 33.05,13.51 U1.P$74 | U1.P$84 33.05,13.58 U1.P$74
  Top 0.152: U1.P$80 33.05,14.8 U1.P$74 | U1.P$89 34.27,12.37 35.34,12.37 U1.P$74 | U1.P$85 U1.P$74 | U1.P$90 35.41,12.37 U1.P$74 | U1.P$86 35.34,13.51 34.8,12.98 U1.P$74 | U1.P$81 34.19,14.8 U1.P$74 | 31.83,16.02 U1.P$75 | 31.83,16.02 U1.P$74 | 32.44,15.41 32.97,15.95 U1.P$76 | 32.44,15.41 U1.P$74 | U1.P$77 34.27,15.95 34.8,15.41 U1.P$74 | U1.P$82 35.34,14.8 34.8,15.34 U1.P$74 | U1.P$78 35.41,16.02 U1.P$74 | 31.26,21.4 31.6,21.74 32.67,21.74 34.04,20.37 34.04,19.68 34.08,19.64 | v36.17,8.63 36.25,8.63 | R1_USB.1 29.16,27.45 29.16,29.05 29.09,29.13 J4.SH3 29.09,29.21 29.09,29.74 31.07,31.72 31.14,31.72 31.6,32.18 31.6,32.56 D3.2 | J4.SH1 29.09,33.4 30.31,33.4 30.38,33.47 31.07,33.47 31.6,32.94 31.6,32.63 D3.2 | 19.41,33.47 20.32,33.47 20.4,33.4 J4.SH2 | 19.41,33.47 15.07,33.47 14.84,33.24 14.84,32.94 15.07,32.71 15.22,32.71 C38.1 15.29,32.71 15.29,31.53 15.64,31.19 15.82,31.19 C37.1 | C27.1 14,26.77 15.22,26.77 U3.4 15.29,26.77 15.68,26.77 16.29,27.38 U3.9 | U3.9 16.21,27.53 16.21,27.68 15.68,28.22 15.29,28.22 U3.1 15.22,28.29 9.43,28.29 | U3.6 17.2,27.3 16.44,27.3 16.29,27.45 U3.9 | 17.54,30.77 17.58,30.73 17.58,30.58 R9.1 17.66,30.5 18.11,30.5 18.8,29.82 C43.2 | 17.54,30.77 17.2,31.11 17.2,31.34 IC1.D2 | v21.16,26.92 21.39,27.15 21.77,27.15 C42.2 | 19.9,28.71 20.4,29.21 J4.SH4 | 19.9,28.71 19.26,28.06 R2_USB.2 | 19.9,28.71 18.88,29.74 C43.2 | U3.9 16.06,27.91 16.82,28.67 17.43,28.67 18.65,29.89 C43.2 | 19.41,33.47 19.41,32.41 18.88,31.87 C39.2 18.8,31.8 18.61,31.8 18.11,31.3 18.07,31.3 17.54,30.77 | 10.76,15.3 8.67,13.2 8.67,11.15 J1.MP2 | 10.76,15.3 10.8,15.34 11.18,15.34 J1.17
  Top 0.152: 7.75,31.34 7.75,31.19 7.98,30.96 C33.2 | 7.75,31.34 7.75,31.8 | IC9.C3 10.27,31.26 9.96,31.26 IC9.C2 9.88,31.26 9.58,31.26 IC9.C1 9.5,31.34 9.5,31.64 IC9.B1 9.43,31.64 9.24,31.84 | 9.24,31.84 9.12,31.95 9.12,32.18 10.42,33.47 C24.1 | 7.75,31.8 9.2,31.8 9.24,31.84 | 9.43,28.29 9.43,27.23 8.7,26.5 | 9.43,28.29 9.43,29.13 C25.2 9.35,29.13 7.83,29.13 6.53,30.42 6.53,31.04 6.84,31.34 7.75,31.34 | 8.7,26.5 8.67,26.46 8.67,24.25 J1.MP1 8.67,24.18 8.67,17.62 10.72,15.57 10.72,15.34 10.76,15.3 | 32.78,23.45 32.82,23.49 32.82,28.52 33.51,29.21 33.51,32.94 32.97,33.47 32.06,33.47 31.6,33.02 D3.2 | 8.7,26.5 7.96,26.5 7.45,25.99 4.74,25.99 TP_BAT_GND.TP | C23.1 7.41,32.66 7.41,32.28 7.75,31.94 7.75,31.8 | 34.61,5.7 34.23,5.7 C30.1
  Top 0.3: v43.9,25.7 39.86,25.7 J2.5 J2.3
  Bottom 0.152: 9.88,5.05 12.25,5.05 v12.7,5.51 | 9.88,5.05 v8.82,5.05 | 14.76,11.83 14.76,11.45 9.88,6.57 9.88,5.05 | 14.76,11.83 v14.76,13.13 | v36.17,8.63 36.17,11.6 35.41,12.37 U1.P$90 | 21.16,28.22 21.16,28.29 20.48,28.98 20.48,29.13 J4.SH4 | 21.16,28.22 v21.16,26.92 | 28.29,28.25 28.25,28.22 21.16,28.22 | 28.29,28.25 29.01,28.98 29.01,29.13 J4.SH3 | 28.29,28.25 29.32,27.23 29.32,18.08 31.37,16.02 31.75,16.02 U1.P$75 | 14.76,11.83 29.39,11.83 29.93,12.37 31.75,12.37 U1.P$87
  other vias: 43.9,24.5 43.9,23.2 43.9,22 43.9,20.6 43.9,19.3 43.9,17.9 7.2,28.2 7.2,26.6 17.5,4.4 17.5,2.9 43.5,4.2 42.3,4.7
  pour Route2: 14.78,0.18 14.77,0.18 20.42,0.18 20.44,0.16 20.52,0.08 20.52,2.42 20.54,2.44 20.86,2.76 20.88,2.78 25.32,2.78 25.34,2.76 25.66,2.44 25.68,2.42 25.68,0.23 25.73,0.18 31.22,0.18 31.22,2.32 31.24,2.34 31.56,2.66 31.58,2.68 36.72,2.68 36.74,2.66 36.86,2.54 36.88,2.52 36.88,0.28 36.86,0.26 36.78,0.18 40.37,0.18 40.56,0.36 40.58,0.38 41.27,0.38 42.06,1.16 42.08,1.18 42.47,1.18 43.16,1.86 43.18,1.88 43.37,1.88 44.76,3.26 44.78,3.28 45.02,3.28 45.02,3.97 44.74,4.26 44.72,4.28 44.72,4.32 44.74,4.34 45.36,4.96 45.38,4.98 45.72,4.98 45.72,6.47 45.64,6.56 45.62,6.58 45.62,8.42 45.64,8.44 46.12,8.93 46.12,29.87 43.64,32.36 43.62,32.38 43.62,33.07 43.17,33.52 40.88,33.52 40.86,33.54 40.84,33.56 40.82,33.58 40.82,33.62 40.84,33.64 41.36,34.16 41.38,34.18 41.72,34.18 41.37,34.52 39.88,34.52 39.86,34.54 39.57,34.82 6.23,34.82 6.04,34.64 6.02,34.62 5.98,34.62 5.96,34.64 5.77,34.82 4.83,34.82 4.04,34.04 4.02,34.02 3.33,34.02 2.48,33.17 2.48,33.08 2.46,33.06 1.84,32.44 1.82,32.42 1.73,32.42 1.38,32.07 1.38,31.98 1.36,31.96 0.84,31.44 0.82,31.42 0.63,31.42 0.58,31.37 0.58,29.78 0.56,29.76 0.08,29.27 0.08,24.57 0.08,24.58 6.92,24.58 6.94,24.56 7.06,24.44 7.08,24.42 7.08,10.78 7.06,10.76 6.94,10.64 6.92,10.62 0.13,10.62 0.08,10.57 0.08,5.73 0.36,5.44 0.38,5.42 0.38,4.63 1.06,3.94 1.08,3.92 1.08,3.43 2.83,1.68 3.02,1.68 3.04,1.66 4.13,0.58 4.52,0.58 4.54,0.56 4.73,0.38 6.62,0.38 6.64,0.36 6.73,0.28 9.22,0.28 9.22,2.12 9.24,2.14 9.56,2.46 9.58,2.48 14.57,2.48 14.66,2.56 14.68,2.58 14.72,2.58 14.74,2.56 14.76,2.54 14.78,2.52
  pour Top: 20.32,0.18 20.34,0.16 20.52,-0.02 20.52,2.12 20.54,2.14 21.66,3.26 21.68,3.28 25.42,3.28 25.44,3.26 25.46,3.24 25.48,3.22 25.48,0.33 25.73,0.08 31.42,0.08 31.42,2.42 31.44,2.44 32.16,3.16 32.18,3.18 36.12,3.18 36.14,3.16 36.76,2.54 36.78,2.52 36.78,0.08 41.07,0.08 41.66,0.66 41.68,0.68 42.27,0.68 43.12,1.53 43.12,1.72 43.14,1.74 44.69,3.3 44.64,3.36 44.62,3.38 44.62,4.42 44.64,4.44 45.82,5.63 45.82,27.67 45.74,27.76 45.72,27.78 45.72,30.37 43.67,32.42 43.38,32.42 43.36,32.44 41.47,34.32 40.98,34.32 40.96,34.34 40.57,34.72 5.23,34.72 5.04,34.54 5.02,34.52 4.23,34.52 2.98,33.27 2.98,33.08 2.96,33.06 0.08,30.17 0.08,28.03 0.16,27.94 0.18,27.92 0.18,24.68 6.82,24.68 6.84,24.66 6.93,24.58 7.12,24.58 7.14,24.56 7.26,24.44 7.28,24.42 7.28,10.28 7.26,10.26 7.24,10.24 7.22,10.22 7.18,10.22 7.16,10.24 6.97,10.42 0.33,10.42 0.28,10.37 0.28,5.33 0.66,4.94 0.68,4.92 0.68,4.43 1.26,3.84 1.28,3.82 1.28,3.33 3.03,1.58 3.42,1.58 3.44,1.56 4.73,0.28 9.42,0.28 9.42,2.27 9.34,2.36 9.32,2.38 9.32,2.42 9.34,2.44 9.36,2.46 9.38,2.48 14.27,2.48 14.46,2.66 14.48,2.68 14.52,2.68 14.54,2.66 14.56,2.64 14.58,2.62 14.58,0.23 14.63,0.18
  pour Bottom: 6.12,0.18 6.14,0.16 6.23,0.08 6.57,0.08 6.66,0.16 6.68,0.18 9.27,0.18 9.42,0.33 9.42,2.62 9.44,2.64 9.66,2.86 9.68,2.88 14.52,2.88 14.54,2.86 14.56,2.84 14.58,2.82 14.58,0.33 14.73,0.18 20.47,0.18 20.72,0.43 20.72,2.52 20.74,2.54 21.36,3.16 21.38,3.18 25.72,3.18 25.74,3.16 25.76,3.14 25.78,3.12 25.78,3.08 25.76,3.06 25.68,2.97 25.68,0.23 25.73,0.18 31.12,0.18 31.12,2.32 31.14,2.34 31.66,2.86 31.68,2.88 36.62,2.88 36.64,2.86 36.66,2.84 36.68,2.82 36.68,0.28 40.37,0.28 40.86,0.76 40.88,0.78 42.27,0.78 43.82,2.33 43.82,2.42 43.84,2.44 45.12,3.73 45.12,4.42 45.14,4.44 45.62,4.93 45.62,29.87 45.24,30.26 45.22,30.28 45.22,31.07 43.17,33.12 42.68,33.12 42.66,33.14 41.07,34.72 40.48,34.72 40.46,34.74 40.37,34.82 6.93,34.82 6.64,34.54 6.62,34.52 4.43,34.52 3.84,33.94 3.82,33.92 3.33,33.92 1.68,32.27 1.68,31.78 1.66,31.76 0.48,30.57 0.48,29.58 0.46,29.56 0.11,29.2 0.26,29.04 0.28,29.02 0.28,24.67 0.28,24.68 7.02,24.68 7.04,24.66 7.16,24.54 7.18,24.52 7.18,10.58 7.16,10.56 7.14,10.54 7.12,10.52 0.33,10.52 0.08,10.27 0.08,5.33 0.96,4.44 0.98,4.42 0.98,3.53 1.73,2.78 1.92,2.78 1.94,2.76 3.93,0.78 4.92,0.78 4.94,0.76 5.53,0.18
IMU_INT1  (1 unrouted)
IMU_INT2  (1 unrouted)
LX1
  Top 0.152: IC9.B2 9.96,31.64 10.27,31.64 IC9.B3 10.34,31.64 12.4,31.64 12.78,31.26 L7.1
LX2
  Top 0.152: IC9.D2 9.96,30.88 10.27,30.88 IC9.D3 10.34,30.88 11.03,30.88 12.78,29.13 L7.2
N$1  (via drill 0.35)
  Top 0.152: v31.75,8.79 31.37,9.17 30.46,9.17 30.31,9.32 30.31,10.92 30.69,11.3 30.99,11.3 31.07,11.38 31.53,11.38 U1.P$AC5 | v32.59,10.16 31.91,10.16 31.83,10.08 C20.1
  Bottom 0.152: v31.75,8.79 31.75,9.32 v32.59,10.16
N$2  (via drill 0.35)
  other vias: 43.11,11.67
N$3  (via drill 0.35)
  other vias: 42.2,11.6
N$4
  Top 0.152: U1.P$F2 30.57,15.68 30.49,15.76 30.01,15.76 C18.1 29.24,14.96 29.24,14.8 28.93,14.5 27.56,14.5 27.18,14.88 23.68,14.88 21.7,12.9 20.48,12.9 19.94,12.37 19.94,11.68 18.95,10.69 16.89,10.69 15.9,9.7 15.9,8.48 15.37,7.95 15.37,7.41 15.83,6.96 24.36,6.96 28.4,10.99 X2.2
N$5
  Top 0.152: C5.1 29.88,16.9 U1.P$C1
N$6  (via drill 0.35)
  other vias: 42.5,6.83
N$7
  Top 0.152: U1.P$D23 36.64,16.18 36.71,16.26 37.4,16.26 C11.1
N$8
  Top 0.152: U1.P$A23 36.89,17.97 C2.1 36.94,18.46 37.62,18.46 38.23,19.07 X1.3
N$9
  Top 0.152: L3.2 30.84,22.04 31.75,22.04 32.13,22.42 L2.1
N$10
  Top 0.152: U1.P$B3 31.07,16.94 31.07,18.39 30.84,18.61 30.84,20.98 L3.1
N$11  (via drill 0.35)
  other vias: 43.39,6.4
N$12
  Top 0.152: IC3.1 29.09,21.89 29.54,21.89 R3.1
N$13  (via drill 0.35)
  other vias: 44.3,6.3
N$14  (via drill 0.35)
  other vias: 44.53,12
N$15  (via drill 0.35)
  other vias: 41.37,11.05
N$16  (via drill 0.35)
  Top 0.152: v7.14,30.73 7.45,30.42 9.5,30.42 IC9.E1 | v12.17,32.63 12.78,32.63 13.31,33.17 R2.2
  Bottom 0.152: v7.14,30.73 7.67,30.73 8.97,32.03 11.56,32.03 v12.17,32.63
N$17  (via drill 0.35)
  Top 0.152: v8.89,31.04 9.05,30.88 9.5,30.88 IC9.D1 | v14.46,30.42 14.46,30.12 14.23,29.89 14.23,29.74 R4.2
  Bottom 0.152: v8.89,31.04 13.85,31.04 v14.46,30.42
N$18  (via drill 0.35)
  Top 0.152: U1.P$D2 30.57,16.18 30.49,16.1 29.31,16.1 C17.1 29.16,15.95 29.16,15.72 28.93,15.49 28.1,15.49 v28.02,15.41 | v26.88,14.27 27.33,14.27 28.02,13.58 28.4,13.58 X2.1
  Bottom 0.152: v26.88,14.27 v28.02,15.41
N$19
  Top 0.152: IC1.D1 16.74,31.34 16.74,31.04 17.05,30.73 17.05,30.58 R9.2
N$20  (via drill 0.35)
  other vias: 40.93,10.21
N$21
  Top 0.152: C32.2 9.88,7.56 11.33,7.56 12.63,8.86 12.63,9.93 11.87,10.69 10.88,10.69 8.06,7.87 8.06,7.64 IC2.A2
N$22
  Top 0.152: R1_USB.2 28.63,27.45 26.57,27.45 26.04,27.99 26.04,28.6 J4.A5
N$23
  Top 0.152: J4.B5 22.91,28.6 22.91,27.99 22.6,27.67 19.4,27.67 R2_USB.1
N$24
  Top 0.152: EPD_C2.1 12.78,23.34 12.78,23.11 11.64,21.97 11.26,21.97 J1.4
N$25
  Top 0.152: EPD_C1.1 12.78,22.04 12.25,22.04 11.64,21.43 11.26,21.43 J1.5
N$26
  Top 0.152: EPD_C6.1 12.86,19.61 12.86,19.3 11.87,18.31 11.87,15.18 11.64,14.96 11.26,14.96 J1.18
N$27
  Top 0.152: C13.1 34.85,18.24 U1.P$A18
N$28  (1 unrouted)
N$29
  Top 0.152: EPD_C8.1 12.86,17.09 12.86,16.56 12.17,15.87 12.17,14.5 11.64,13.97 11.26,13.97 J1.20
N$30
  Top 0.152: EPD_C10.1 12.78,14.27 12.78,14.04 11.71,12.98 11.26,12.98 J1.22
N$31
  Top 0.152: EPD_C12.1 12.86,11.91 11.26,11.91 J1.24
N$32  (via drill 0.35)  (1 unrouted)
  Top 0.152: U1.P$B5 31.6,18.78 C15.1 31.6,18.84 31.68,18.92 32.21,18.92 | C16.1 37.98,15.93 U1.P$E24 | v37.93,12.06 37.93,12.9 C10.1 | 32.21,18.92 32.21,21.05 L2.2 | 32.21,18.92 v32.44,18.92
  Bottom 0.152: v37.93,12.06 37.93,14.42 33.43,18.92 v32.44,18.92
N$33
  Top 0.152: U1.P$B24 37.4,16.93 37.77,17.3 37.85,17.3 C1.1 38.31,17.78 38.31,18 38.46,18.16 38.61,18.16 38.99,18.54 38.99,19.61 39.22,19.83 39.3,19.83 39.68,20.21 X1.1
N$34
  Top 0.152: R_TYPE_SEL.2 17.43,20.9 16.36,20.9 R1_EP_DR.1 16.36,20.82 16.36,19.61 16.21,19.45 SJ1.2
N$35
  Top 0.152: D5.2 19.26,16.56 19.41,16.41 20.7,16.41 C2-EP-DR.2 20.7,16.48 20.7,16.86 21.62,17.78 L5.1 21.7,17.85 18.11,21.43 18.11,22.5 Q3.3
N$36  (via drill 0.35)
  other vias: 40.93,9.3
N$37
  Top 0.152: C2-EP-DR.1 20.7,14.88 19.48,14.88 19.1,14.5 D2.1 19.1,14.42 19.1,12.29 D4.1
N$38  (via drill 0.35)
  other vias: 40.93,8.3
N$39
  Top 0.2: U1.P$H23 36.45,15.28 37,15.28 37.07,15.21 C3.1 38.07,15.09 38.07,14.89 38.22,14.74 38.71,14.74 39.03,15.06 L1.1
N$40  (1 unrouted)
  Top 0.2: L1.2 41.34,15.06 C4.1 41.42,15.11 C22.1 43.8,14.37 43.8,11.19
N$41
  Top 0.152: U1.P$N24 36.86,13.97 37.85,13.97 37.93,14.04 C9.1
OUT+
  Top 0.152: IC2.A3 9.43,7.64 11.1,9.32 11.33,9.32 TP_OP.TP
OUT-  (via drill 0.35)
  Top 0.152: v9.2,6.57 8.51,6.57 IC2.C3 | v7.29,4.44 6.23,4.44 4.63,2.84 TP_ON.TP
  Bottom 0.152: v9.2,6.57 9.2,6.35 v7.29,4.44
P0.13/1.5D
  Top 0.152: R5.1 32.37,5.58 32.37,5.51 32.64,5.25 | SW_UP.2 32.65,5.23 32.64,5.25 | 32.64,5.25 32.67,5.28 32.9,5.28 33.04,5.42 33.49,5.42 C30.2
P0.14/1.5D
  Top 0.152: C31.2 22.84,5.66 21.7,5.66 R8.1 21.62,5.58 21.62,4.29 SW_ENT.2
P1.01/1.6C
  Top 0.152: R_PWR_EPD.1 21.47,11.22 21.47,11.6 20.93,12.14 Q1.1
P1.02/1.6C
  Top 0.152: 10.68,4.78 10.57,4.67 10.57,4.21 SW_DN.2 | 10.68,4.78 11.41,5.51 11.64,5.51 C29.2 | 10.68,4.78 10.19,5.28 10.19,5.51 R7.1
PMIC_INT  (1 unrouted)
PREVGH
  Top 0.152: EPD_C9.1 12.93,15.72 13.77,16.56 15.68,16.56 D5.1 15.68,16.48 16.74,15.41 16.74,11.98 16.06,11.3 10.95,11.3 10.65,11.6 10.65,13.13 10.88,13.36 11.18,13.36 J1.21
PREVGL
  Top 0.152: J1.23 11.26,12.44 11.64,12.44 12.25,13.05 12.86,13.05 EPD_C11.1 12.93,13.13 13.47,13.66 14.08,13.66 14.84,14.42 15.52,14.42 D2.2
RESE  (via drill 0.35)
  Top 0.152: R1_EP_DR.2 15.83,20.98 15.83,21.81 15.9,21.89 Q3.2 15.83,21.89 15.37,22.35 v14.61,22.35 | v10.34,22.35 11.18,22.35 J1.3
  Bottom 0.152: v14.61,22.35 v10.34,22.35
RESET  (2 unrouted)
SCL/1.4C  (via drill 0.35)
  Top 0.152: v7.45,5.96 7.45,6.57 IC2.C1 | v17.12,25.78 17.89,26.54 17.89,27.45 17.58,27.76 17.28,27.76 U3.7
  Bottom 0.152: v7.45,5.96 7.45,9.32 17.12,18.99 v17.12,25.78
SCL/2.4C  (via drill 0.35)  (1 unrouted)
  Top 0.152: IC1.B1 16.67,32.18 16.59,32.18 16.36,31.95 16.36,30.73 R17.2 16.59,30.5 16.59,30.35 16.63,30.31 | v28.32,21.13 28.48,21.28 29.01,21.28 IC3.12 | v17.12,29.28 17.12,29.82 16.63,30.31 | 16.63,30.31 15.75,29.43 15.14,29.43 14.91,29.66 14.76,29.66 R4.1 | v4.86,5.28 3.33,5.28 TP_SCL.TP
  Bottom 0.152: v28.32,21.13 25.28,21.13 23.56,22.84 | v17.12,29.28 23.56,22.84 | v4.86,5.28 7.67,5.28 8.59,6.19 8.59,7.87 23.56,22.84
SDA/1.4C  (1 unrouted)
SDA/2.4C  (via drill 0.35)  (1 unrouted)
  Top 0.152: 29.05,12.4 28.78,12.14 24.82,12.14 20.7,8.02 18.88,8.02 17.5,9.39 TP_SDA.TP 17.73,9.09 16.36,7.72 R18.2 | 29.05,12.4 29.54,12.9 29.54,13.66 30.31,14.42 U1.P$L1 | v28.55,22.58 28.55,21.89 IC3.2 | v29.01,12.44 29.05,12.4 | v14.15,32.33 14.15,33.09 13.62,33.63 13.54,33.63 R2.1
  Bottom 0.152: v29.01,12.44 29.01,21.36 28.55,21.81 v28.55,22.58 24.59,22.58 20.55,26.61 20.55,26.77 17.43,29.89 17.05,29.89 14.61,32.33 v14.15,32.33
SWDCLK  (via drill 0.35)  (1 unrouted)
  Top 0.152: v37.47,11.22 37.47,11.3 36.86,11.91 U1.P$AA24 | v37.24,5.74 37.24,6.57 36.71,7.11 TP_SWDCLK.TP
  Bottom 0.152: v37.47,11.22 37.47,5.96 v37.24,5.74
SWDIO  (1 unrouted)
  Top 0.152: TP_SWDIO.TP 37.87,6.03 37.87,7.67 36.85,8.68 U1.P$AC24
SWO
  Top 0.152: U1.P$AD22 35.79,10.92 35.79,10.46 33.28,7.95 33.28,7.56 TP_SWO.TP
VBAT/1.2A
  Top 0.152: U3.2 15.29,27.76 15.29,27.3 U3.3 15.22,27.23 14,27.23 C27.2 13.92,27.23 11.18,27.23 10.42,26.46 TP_VBAT.TP
VBAT/2.5C  (via drill 0.35)
  Top 0.152: v15.9,32.41 15.9,31.6 C37.2 | IC1.C2 17.2,31.87 17.73,31.87 17.76,31.9 v17.86,31.9
  Bottom 0.152: v15.9,32.41 16.36,31.95 17.81,31.95 v17.86,31.9
VBUS/1.5D  (via drill 0.35)  (2 unrouted)
  Top 0.152: 22.24,26.83 21.72,26.31 19.71,26.31 18.72,27.3 18.72,28.67 18.8,28.75 C43.1 | C42.1 22.23,27.15 22.23,26.92 22.19,26.88 22.24,26.83 | v28.1,26.84 29.32,26.84 31.6,29.13 31.6,30.04 D3.5 | v25.73,26.84 25.53,26.64 22.43,26.64 22.24,26.83
  Bottom 0.152: v25.73,26.84 v28.1,26.84
VBUS/2.6D  (1 unrouted)
  Top 0.152: C21.1 | IC1.A2 17.12,32.63 17.12,32.71 16.74,33.09 15.29,33.09 C38.2
  Top 0.254: C21.1 U1.P$AD2
VREG  (via drill 0.35)
  Top 0.152: IC9.A1 9.58,32.1 9.88,32.1 IC9.A2 9.96,32.1 10.27,32.1 | 10.27,32.1 IC9.A3 | 8.78,32.83 9.43,33.47 C24.2 | 8.78,32.83 8.25,32.29 | 8.25,32.29 8.21,32.25 8.18,32.25 C23.2 | v10.65,32.63 10.65,32.56 10.27,32.18 10.27,32.1 | v8.82,32.79 8.78,32.83 | C39.1 18.8,32.86 v17.96,32.86 17.3,32.21 IC1.B2 | TP_VREG.TP 4.25,31.95 6.08,31.95 7.17,33.04 7.58,33.04 7.71,32.9 7.71,32.82 8.25,32.29
  Bottom 0.152: v8.82,32.79 8.97,32.63 v10.65,32.63 11.26,33.24 15.98,33.24 16.36,32.86 v17.96,32.86